# Altium PCB LimeNet-Micro_SODIMM_adapter_1v2.PcbDoc
Units mm, origin at the board's own origin, x right, y up, seen from the top; angles counter-clockwise.
Board outline 67.6 x 30 mm, 2 copper layers (Top, Bottom), stack 1.586 mm thick; 27 components, 55 nets, 309 pads, 78 vias.
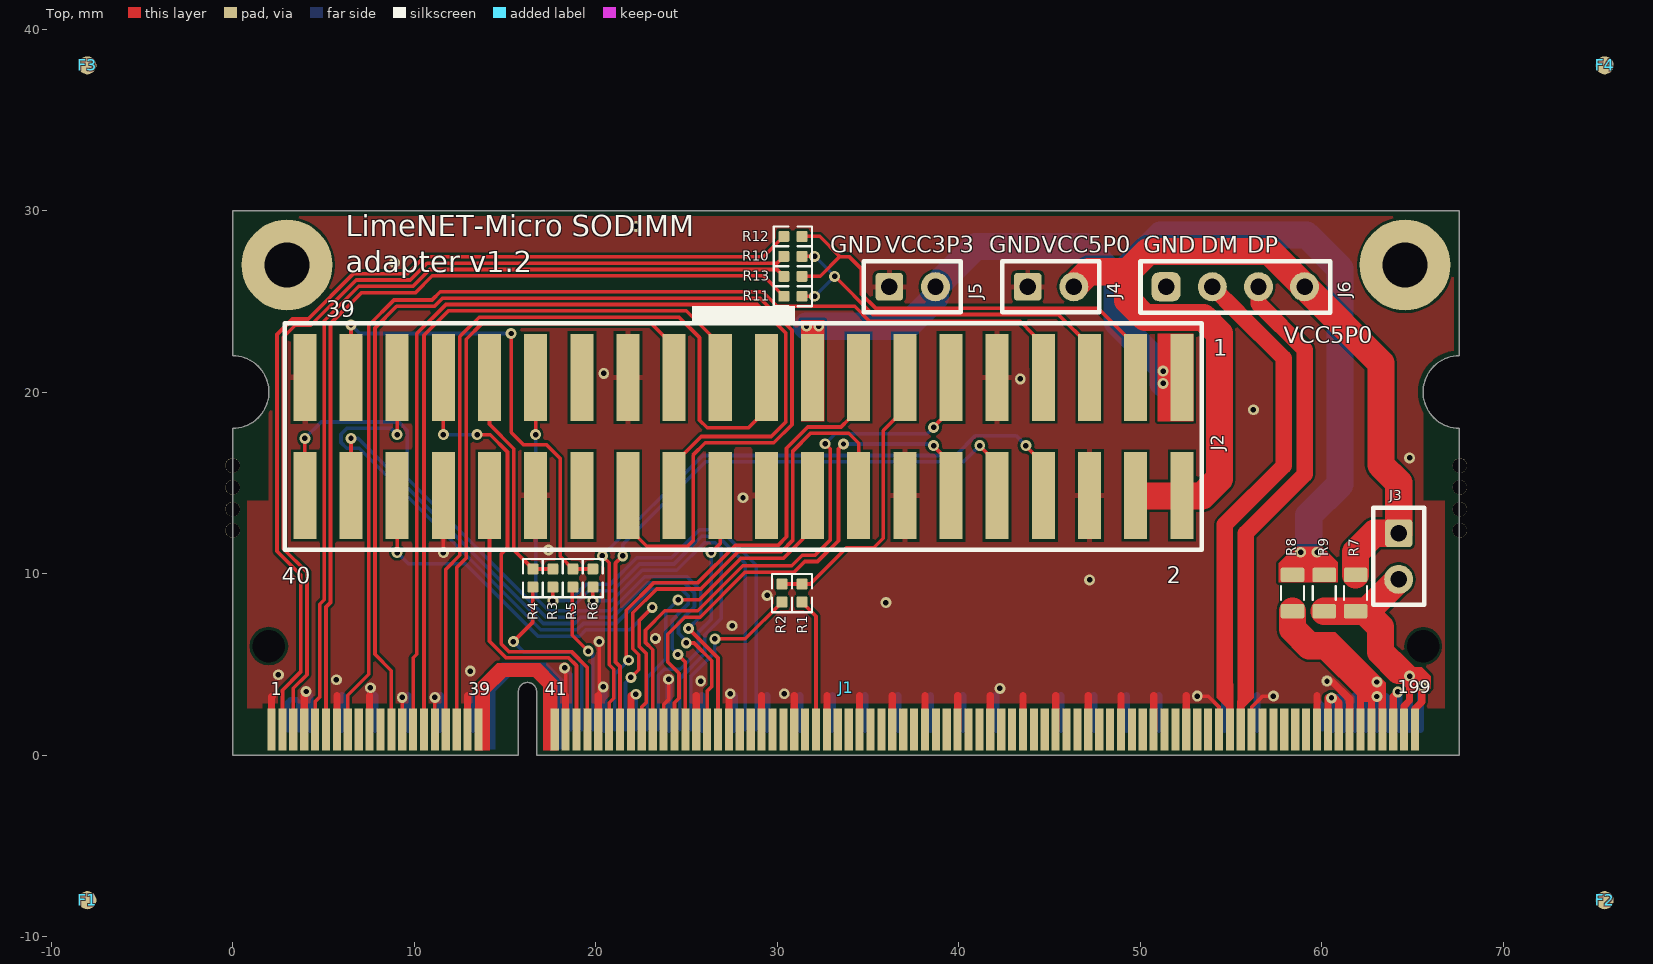
[diagram p0: Top view]
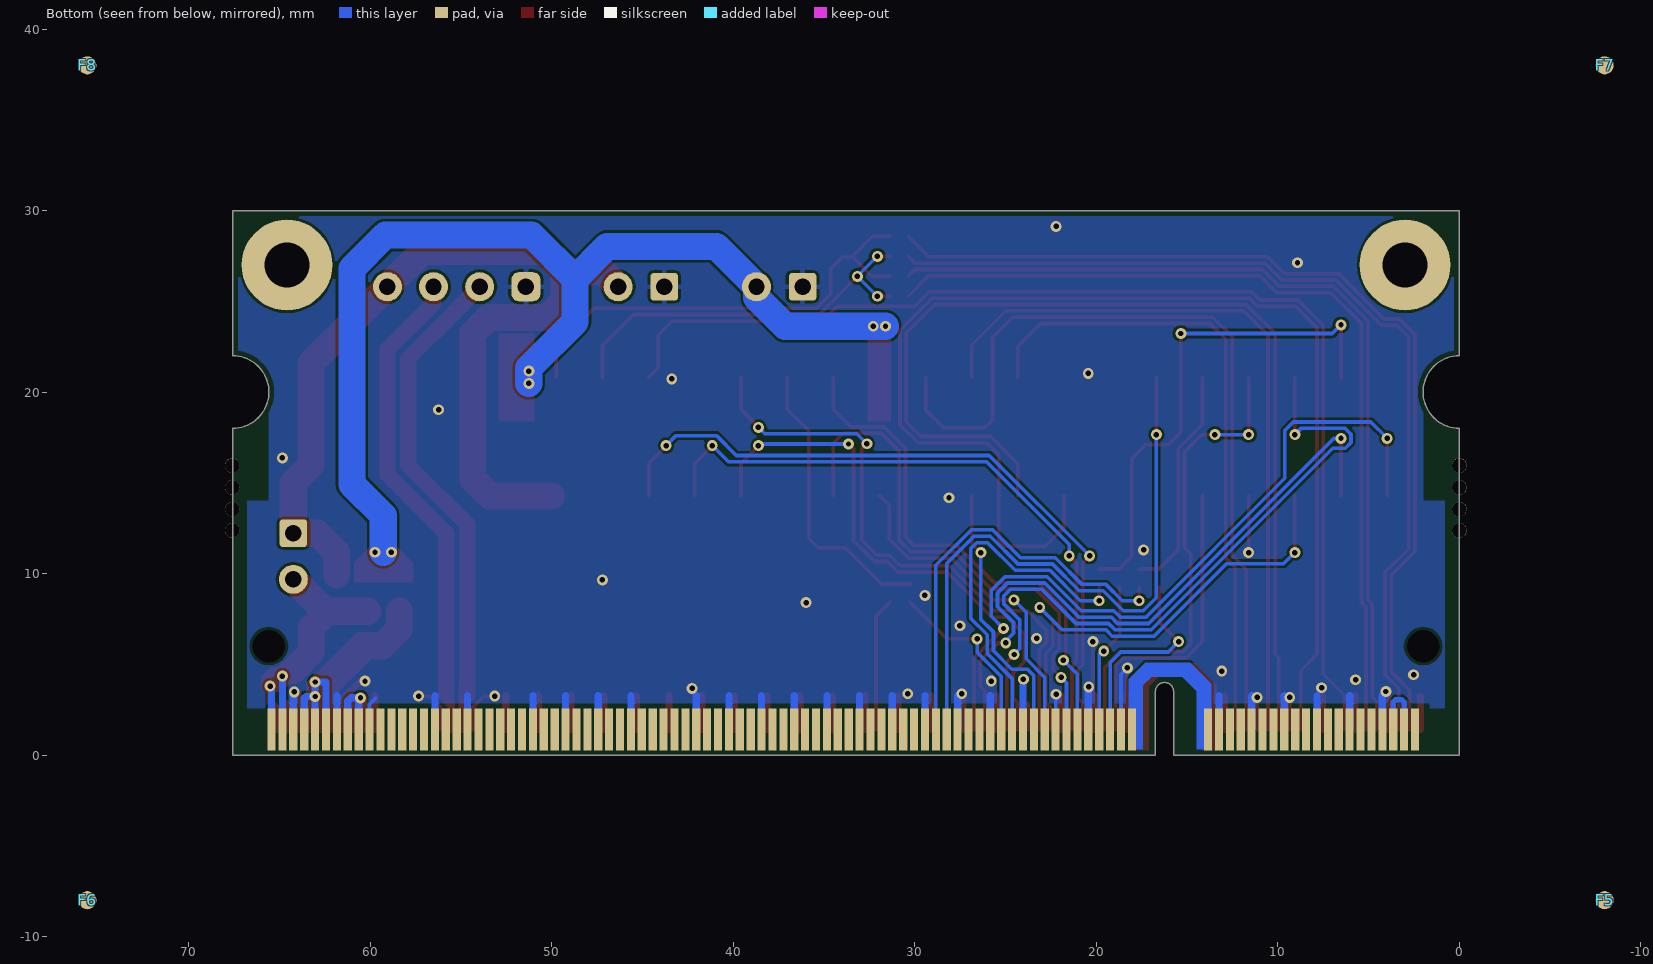
[diagram p1: Bottom view, seen from below]

## Layer stack, top to bottom
TopSolder: solder mask 0.0102, Solder Resist, Dk 3.5
Top: signal copper 0.0178
Dielectric1: core 1.55, FR-4, Dk 4.8
Bottom: signal copper 0.0178
BottomSolder: solder mask 0.0102, Solder Resist, Dk 3.5

## Board outline
0,0 0,18 ccw(c0,20) 0,22 0,30 67.6,30 67.6,22 ccw(c67.6,20) 67.6,18 67.6,0 16.75,0 16.75,3.5 ccw(c16.25,3.5) 15.75,3.5 15.75,0

## Design rules (kind name [scope] priority, off if disabled: settings)
BoardOutlineClearance [All] p1: gap=0.3 ignorepadtopadclearanceinfootprint=FALSE
Clearance [All] p1: gap=0.15 ignorepadtopadclearanceinfootprint=FALSE except(0: Arc-Hole Track-Hole SMDPad-Hole THPad-Hole Via-Hole Fill-Hole Poly-Hole Region-Hole Text-Hole)
ComponentClearance ComponentClearance_RF_jumpers [(ObjectKind = '3D Body') And (Identifier = 'Rpi3Bplus') or (ObjectKind = 'Component')] p1: gap=-15 collisioncheckmode=3 verticalgap=2540 showdistances=FALSE
ComponentClearance [All] p2: gap=0.5 collisioncheckmode=3 verticalgap=0.254 showdistances=FALSE
DiffPairsRouting DiffPairsRouting_RAPI_USB [InDifferentialPair('RAPI_USB_D')] p1: maxlimit=0.3 minlimit=0.15 mostfreqgap=0.25 toplayer_minwidth=0.15 toplayer_maxwidth=2 toplayer_prefwidth=0.9 bottomlayer_minwidth=0.15 bottomlayer_maxwidth=2 bottomlayer_prefwidth=0.9 maxuncoupledlength=2
DiffPairsRouting [All] p2: maxlimit=0.3 minlimit=0.1 mostfreqgap=0.1 toplayer_minwidth=0.1 toplayer_maxwidth=0.5 toplayer_prefwidth=0.2 bottomlayer_minwidth=0.1 bottomlayer_maxwidth=0.5 bottomlayer_prefwidth=0.2 maxuncoupledlength=12.7
FabricationTestPointUsage TestPointUsage [All] p1: valid=0 allowmultiple=FALSE
FabricationTestpoint Testpoint [All] p1: side=3 testpointundercomponent=TRUE minsize=1.016 maxsize=2.54 preferedsize=1.524 minholesize=0.508 maxholesize=1.016 preferedholesize=0.813 testpointgrid=0.025 allowsidetop=TRUE allowsidebottom=TRUE usegrid=TRUE gridtolerance=0
HoleSize [All] p1: absolutevalues=TRUE maxlimit=10 minlimit=0.3 maxpercent=80.000 minpercent=20.000
HoleToHoleClearance [All] p1: gap=0.15 allowstackedmicrovias=TRUE
MinimumSolderMaskSliver [All] p1: minsoldermaskwidth=0.1
PlaneClearance [All] p1: clearance=0
PolygonConnect PolygonConnect_GND_VIA [InNet('GND') and isvia] p1: connectstyle=Direct reliefconductorwidth=0.254 reliefentries=4 polygonreliefangle="90 Angle" airgapwidth=0.254
PolygonConnect PolygonConnect_GND [InNet('GND')] p2: connectstyle=Relief reliefconductorwidth=0.3 reliefentries=4 polygonreliefangle="90 Angle" airgapwidth=0.15
PolygonConnect [All] p3: connectstyle=Relief reliefconductorwidth=0.254 reliefentries=4 polygonreliefangle="90 Angle" airgapwidth=0.254
RoutingVias [All] p1: holewidth=0.2 width=0.4 viastyle="Through Hole" minholewidth=0.2 minwidth=0.31 maxholewidth=4.5 maxwidth=5
SilkToSilkClearance [All] p1: silktosilkclearance=0.1
SilkToSolderMaskClearance SilkscreenOverComponentPads [IsPad] p1: minsilkscreentomaskgap=0.254 clearancetoexposedcopper=TRUE
SolderMaskExpansion [All] p1: expansion=0.05
Width Width_ClumsyConnection [All] p1: maxlimit=7 minlimit=0.15 preferedwidth=0.2 checkconnectedcopper=TRUE
Width [All] p2: maxlimit=5 minlimit=0.15 preferedwidth=0.2
20 further rules are at their usual default settings.

## Classes and differential pairs
net class RAPI_GPIO: RAPI_GPCLK0 RAPI_GPIO27 RAPI_I2C0_SCL RAPI_I2C0_SDA RAPI_I2C1_SCL RAPI_I2C1_SDA RAPI_SPI0_CE0 RAPI_SPI0_CE1 RAPI_SPI0_MISO RAPI_SPI0_MOSI RAPI_SPI0_SCLK RAPI_SPI1_CE0 RAPI_SPI1_CE1 RAPI_SPI1_CE2 RAPI_SPI1_MISO RAPI_SPI1_MOSI RAPI_SPI1_SCLK RAPI_UART0_RX RAPI_UART0_TX
net class RAPI_MISC: RAPI_EMMC_DISABLE
net class RAPI_SDX: RAPI_SDX_CLK RAPI_SDX_CMD RAPI_SDX_D0 RAPI_SDX_D1 RAPI_SDX_D2 RAPI_SDX_D3
net class RAPI_USB: RAPI_USB_D_N RAPI_USB_D_P
differential pair RAPI_USB_D: +RAPI_USB_D_P -RAPI_USB_D_N

## Components (designator, comment, footprint, x,y, rotation, side; value= is the part's Value field where it differs from the comment)
F1 "Fiducial" Fiducial -8,-8 r0 top
F2 "Fiducial" Fiducial 75.6,-8 r0 top
F3 "Fiducial" Fiducial -8,38 r0 top
F4 "Fiducial" Fiducial 75.6,38 r0 top
F5 "Fiducial" Fiducial -8,-8 r180 bottom
F6 "Fiducial" Fiducial 75.6,-8 r180 bottom
F7 "Fiducial" Fiducial -8,38 r180 bottom
F8 "Fiducial" Fiducial 75.6,38 r180 bottom
J1 "DDR SODIMM SOCKET" SODIMM_200PIN_PCB_PADS 0,0 r0 top locked
J2 "Header 20x2_SMD" HEADER20X2_SM_V2_FLIPPED 28.143,17.55 r0 top locked
J3 "5V" HDR_1x2 64.25,10.95 r0 top
J4 "5V" HDR_1x2 45.084,25.8 r90 top locked
J5 "3.3V" HDR_1x2 37.458,25.8 r90 top locked
J6 "USB" HEADER4X1_TH 55.254,25.8 r0 top locked
R1 "0R" RES0402 31.375,8.925 r270 top
R2 "0R" RES0402 30.275,8.925 r270 top
R3 "0R" RES0402 17.65,9.75 r270 top
R4 "0R" RES0402 16.55,9.75 r270 top
R5 "0R" RES0402 18.75,9.75 r270 top
R6 "0R" RES0402 19.85,9.75 r270 top
R7 "0R" RES0805 61.875,8.925 r90 top
R8 "0R" RES0805 58.4,8.925 r90 top
R9 "0R" RES0805 60.15,8.925 r90 top
R10 "0R" RES0402 30.875,27.475 r0 top
R11 "0R" RES0402 30.875,25.275 r0 top
R12 "0R" RES0402 30.875,28.575 r0 top
R13 "0R" RES0402 30.875,26.375 r0 top

## Footprints (in the part's own frame and the unit in brackets; to place one, negate y for a bottom-side part, rotate by r counter-clockwise, add the part's x,y. Pads: shape width x height; smd on the part's side, far side on the other; paste and mask are expansions set on the pad)
Fiducial [mm]
  round 1 smd paste-1 mask+1: 1(0,0)
HDR_1x2 [mm]
  rrect25% 1.524x1.524 hole 0.9: 1(0,1.27)
  round 1.6 hole 0.9: 2(0,-1.27)
  silkscreen extent -1.4,-2.68 1.4,2.68, body extent -1.27,-2.54 1.27,2.54, height 8.54
HEADER4X1_TH [mm]
  rrect50% 1.6x1.6 hole 0.9: 1(-3.814,0)
  round 1.6 hole 0.9: 2(-1.271,0) 3(1.271,0) 4(3.814,0)
  silkscreen extent -5.22,-1.43 5.23,1.4, body extent -5.08,-1.27 5.08,1.27, height 8.54
HEADER20X2_SM_V2_FLIPPED [mm]
  rect 1.27x4.8 smd: 1(24.157,3.25) 2(24.157,-3.25) 3(21.614,3.25) 4(21.614,-3.25) 5(19.071,3.25) 6(19.071,-3.25) 7(16.529,3.25) 8(16.529,-3.25) 9(13.986,3.25) 10(13.986,-3.25) 11(11.443,3.25) 12(11.443,-3.25) 13(8.9,3.25) 14(8.9,-3.25) 15(6.357,3.25) 16(6.357,-3.25) 17(3.814,3.25) 18(3.814,-3.25) 19(1.271,3.25) 20(1.271,-3.25) 21(-1.271,3.25) 22(-1.271,-3.25) 23(-3.814,3.25) 24(-3.814,-3.25) 25(-6.357,3.25) 26(-6.357,-3.25) 27(-8.9,3.25) 28(-8.9,-3.25) 29(-11.443,3.25) 30(-11.443,-3.25) 31(-13.986,3.25) 32(-13.986,-3.25) 33(-16.529,3.25) 34(-16.529,-3.25) 35(-19.071,3.25) 36(-19.071,-3.25) 37(-21.614,3.25) 38(-21.614,-3.25) 39(-24.157,3.25) 40(-24.157,-3.25)
  silkscreen extent -25.26,-6.25 25.26,6.25, body extent -25.42,-3.5 25.38,3.5, height 9.66
RES0402 [mm] "Chip Resistor, Body 1.0x0.5mm, EIA 0402, IPC Medium Density"
  round 0.2 on Mech15: 0(0,0)
  rrect20% 0.6x0.6 smd: 1(-0.5,0) 2(0.5,0)
  Top pour cut-out: -0.2,0.35 0.2,0.35 0.2,-0.35 -0.2,-0.35
  silkscreen extent -1.05,-0.55 1.05,0.55, body extent -0.52,-0.27 0.53,0.28, height 0.4
RES0805 [mm] "Chip Resistor, Body 2.0x1.2mm, 0805, IPC Medium Density"
  round 0.254 on Mech15: 0(0,0)
  rrect25% 0.8x1.3 smd: 1(-1,0) 2(1,0)
  Top pour cut-out: -0.6,0.75 0.6,0.75 0.6,-0.75 -0.6,-0.75
  silkscreen extent -0.38,-0.64 0.38,0.64, body extent -1.1,-0.67 1.1,0.68, height 0.69
SODIMM_200PIN_PCB_PADS [mm] "SODIMM 200PIN card PCB fingers"
  rect 0.45x2.3 smd paste-1 mask+0.3: 1(2.15,1.4) 3(2.75,1.4) 5(3.35,1.4) 7(3.95,1.4) 9(4.55,1.4) 11(5.15,1.4) 13(5.75,1.4) 15(6.35,1.4) 17(6.95,1.4) 19(7.55,1.4) 21(8.15,1.4) 23(8.75,1.4) 25(9.35,1.4) 27(9.95,1.4) 29(10.55,1.4) 31(11.15,1.4) 33(11.75,1.4) 35(12.35,1.4) 37(12.95,1.4) 39(13.55,1.4) 41(17.75,1.4) 43(18.35,1.4) 45(18.95,1.4) 47(19.55,1.4) 49(20.15,1.4) 51(20.75,1.4) 53(21.35,1.4) 55(21.95,1.4) 57(22.55,1.4) 59(23.15,1.4) 61(23.75,1.4) 63(24.35,1.4) 65(24.95,1.4) 67(25.55,1.4) 69(26.15,1.4) 71(26.75,1.4) 73(27.35,1.4) 75(27.95,1.4) 77(28.55,1.4) 79(29.15,1.4) 81(29.75,1.4) 83(30.35,1.4) 85(30.95,1.4) 87(31.55,1.4) 89(32.15,1.4) 91(32.75,1.4) 93(33.35,1.4) 95(33.95,1.4) 97(34.55,1.4) 99(35.15,1.4) 101(35.75,1.4) 103(36.35,1.4) 105(36.95,1.4) 107(37.55,1.4) 109(38.15,1.4) 111(38.75,1.4) 113(39.35,1.4) 115(39.95,1.4) 117(40.55,1.4) 119(41.15,1.4) 121(41.75,1.4) 123(42.35,1.4) 125(42.95,1.4) 127(43.55,1.4) 129(44.15,1.4) 131(44.75,1.4) 133(45.35,1.4) 135(45.95,1.4) 137(46.55,1.4) 139(47.15,1.4) 141(47.75,1.4) 143(48.35,1.4) 145(48.95,1.4) 147(49.55,1.4) 149(50.15,1.4) 151(50.75,1.4) 153(51.35,1.4) 155(51.95,1.4) 157(52.55,1.4) 159(53.15,1.4) 161(53.75,1.4) 163(54.35,1.4) 165(54.95,1.4) 167(55.55,1.4) 169(56.15,1.4) 171(56.75,1.4) 173(57.35,1.4) 175(57.95,1.4) 177(58.55,1.4) 179(59.15,1.4) 181(59.75,1.4) 183(60.35,1.4) 185(60.95,1.4) 187(61.55,1.4) 189(62.15,1.4) 191(62.75,1.4) 193(63.35,1.4) 195(63.95,1.4) 197(64.55,1.4) 199(65.15,1.4)
  rect 0.45x2.3 smd far side paste-1 mask+0.3: 2(2.45,1.4) 4(3.05,1.4) 6(3.65,1.4) 8(4.25,1.4) 10(4.85,1.4) 12(5.45,1.4) 14(6.05,1.4) 16(6.65,1.4) 18(7.25,1.4) 20(7.85,1.4) 22(8.45,1.4) 24(9.05,1.4) 26(9.65,1.4) 28(10.25,1.4) 30(10.85,1.4) 32(11.45,1.4) 34(12.05,1.4) 36(12.65,1.4) 38(13.25,1.4) 40(13.85,1.4) 42(18.05,1.4) 44(18.65,1.4) 46(19.25,1.4) 48(19.85,1.4) 50(20.45,1.4) 52(21.05,1.4) 54(21.65,1.4) 56(22.25,1.4) 58(22.85,1.4) 60(23.45,1.4) 62(24.05,1.4) 64(24.65,1.4) 66(25.25,1.4) 68(25.85,1.4) 70(26.45,1.4) 72(27.05,1.4) 74(27.65,1.4) 76(28.25,1.4) 78(28.85,1.4) 80(29.45,1.4) 82(30.05,1.4) 84(30.65,1.4) 86(31.25,1.4) 88(31.85,1.4) 90(32.45,1.4) 92(33.05,1.4) 94(33.65,1.4) 96(34.25,1.4) 98(34.85,1.4) 100(35.45,1.4) 102(36.05,1.4) 104(36.65,1.4) 106(37.25,1.4) 108(37.85,1.4) 110(38.45,1.4) 112(39.05,1.4) 114(39.65,1.4) 116(40.25,1.4) 118(40.85,1.4) 120(41.45,1.4) 122(42.05,1.4) 124(42.65,1.4) 126(43.25,1.4) 128(43.85,1.4) 130(44.45,1.4) 132(45.05,1.4) 134(45.65,1.4) 136(46.25,1.4) 138(46.85,1.4) 140(47.45,1.4) 142(48.05,1.4) 144(48.65,1.4) 146(49.25,1.4) 148(49.85,1.4) 150(50.45,1.4) 152(51.05,1.4) 154(51.65,1.4) 156(52.25,1.4) 158(52.85,1.4) 160(53.45,1.4) 162(54.05,1.4) 164(54.65,1.4) 166(55.25,1.4) 168(55.85,1.4) 170(56.45,1.4) 172(57.05,1.4) 174(57.65,1.4) 176(58.25,1.4) 178(58.85,1.4) 180(59.45,1.4) 182(60.05,1.4) 184(60.65,1.4) 186(61.25,1.4) 188(61.85,1.4) 190(62.45,1.4) 192(63.05,1.4) 194(63.65,1.4) 196(64.25,1.4) 198(64.85,1.4) 200(65.45,1.4)
  round 1.5 hole 1.8 unplated: MH1(2,6) MH2(65.6,6)
  Top pour cut-out: 67.6,0 66.8,0 66.8,14 65.6,14 65.6,20 65.744,19.235 66.178,18.586 66.827,18.152 67.592,18 67.592,18 67.6,18
  Top pour cut-out: 0,0 0.8,0 0.8,14 2,14 2,20 1.856,19.235 1.422,18.586 0.773,18.152 0.008,18 0.008,18 0,18
  Bottom pour cut-out: 67.6,0 66.8,0 66.8,14 65.6,14 65.6,20 65.744,19.235 66.178,18.586 66.827,18.152 67.592,18 67.592,18 67.6,18
  Bottom pour cut-out: 0,0 0.8,0 0.8,14 2,14 2,20 1.856,19.235 1.422,18.586 0.773,18.152 0.008,18 0.008,18 0,18

## Part data
J1: library part 1717254-1, Manufacturer="TE Connectivity AMP Connectors", Supplier Part Number 1=A111047CT-ND, Category="Connectors, Interconnects", ComponentLink1Description=http://www.te.com/commerce/DocumentDelivery/DDEController?Action=srchrtrv&DocNm=1717254&DocType=Customer+Drawing&DocLang=English, ComponentLink1URL=http://www.te.com/commerce/DocumentDelivery/DDEController?Action=srchrtrv&DocNm=1717254&DocType=Customer+Drawing&DocLang=English, Connector Style=SODIMM, Contact Finish=Gold, Contact Finish Thickness=Flash, Features="Board Guide, Latches", Manufacturer Part Number 1=1717254-1, Memory Type="DDR SDRAM", Mounting Feature="Normal, Standard - Top", Mounting Type="Surface Mount, Right Angle", Packaging="Cut Tape (CT)", Part Description="200 Position SODIMM DDR SDRAM Socket Surface Mount, Right Angle", Part Status=Active, Pricing 1="1=3.29, 10=3.155, 25=2.8924, 50=2.761 (USD)", RoHS="RoHS Compliant", Standards=-, Stock 1=610, Supplier 1=Digi-Key
J2: library part "Header 20x2_TH", Color=Black, Current Rating=3A, Flammability Rating="UL94 V-0", Insulation Resistance=5GR, Manufacturer="Amphenol FCI", Manufacturer Part Number 1=95157-140LF, Max Operating Temperature=125°C, Max Voltage Rating (AC)=1.5kV, Min Operating Temperature=-65°C, Package Quantity=100, Supplier Part Number 1=609-2231-ND, ComponentLink1Description=http://portal.fciconnect.com/Comergent/fci/drawing/95157.pdf?src-supplier=Mouser, ComponentLink1URL=http://portal.fciconnect.com/Comergent/fci/drawing/95157.pdf?src-supplier=Mouser, ComponentLink2Description=http://portal.fciconnect.com/Comergent/fci/drawing/95157.pdf?src-supplier=Avnet, ComponentLink2URL=http://portal.fciconnect.com/Comergent/fci/drawing/95157.pdf?src-supplier=Avnet, ComponentLink3Description=https://cdn.amphenol-icc.com/media/wysiwyg/files/drawing/95157.pdf?src-supplier=Digi-Key, ComponentLink3URL=https://cdn.amphenol-icc.com/media/wysiwyg/files/drawing/95157.pdf?src-supplier=Digi-Key, ComponentLink4Description=http://www.alliedelec.com/m/d/e7f216e54bb1f11c7468e99021090c40.pdf?src-supplier=Allied+Electronics, ComponentLink4URL=http://www.alliedelec.com/m/d/e7f216e54bb1f11c7468e99021090c40.pdf?src-supplier=Allied+Electronics, Connector Type="Male Pin", Contact Gender=Male, Contact Material=Bronze, Contact Mating Length=0.23inch, Contact Plating=Gold, Contact Post Length=4.7mm, Depth=4.83mm, Gender=Male, Housing Color=Black, Housing Material=Thermoplastic, Lead Free="Lead Free", Length=50.8mm, Mount="Surface Mount", Number of Contacts=40, Number of Positions=40, Number of Rows=2, Orientation=Straight, Packaging=Bulk, Pitch=2.54mm, Pricing 1="1=1.5, 10=1.365, 100=1.1703, 500=0.97528, 1000=0.83595, 5000=0.74121, 10000=0.72449 (USD)", Radiation Hardening=No, REACH SVHC="No SVHC", Row Spacing=0.1inch, Stock 1=3049, Supplier 1=Digi-Key, Termination=SMD/SMT, Voltage Rating=1.5kV, Width=4.83mm
J3 J4 J5: library part Jumper, Color=Black, Manufacturer=3M, Manufacturer Part Number 1=961102-6404-AR, Supplier Part Number 1=3M9447-ND, Assembly Info=NF, Category="Connectors, Interconnects", Connector Type="Header, Unshrouded", Contact Finish=Gold, Contact Type="Male Pin", Mounting Type="Through Hole", Part Description="2 Positions Header, Unshrouded Connector 0.100\" (2.54mm) Through Hole Gold", Supplier 1=Digi-Key
J6: library part Header4P, "Header, 4-pin", Current Rating=3A, Insulation Color=Black, Manufacturer="Wurth Electronics Inc.", Manufacturer Part Number 1=61300411121, Material Flammability Rating="UL94 V-0", Operating Temperature="-40°C ~ 125°C", Supplier Part Number 1=732-5317-ND, Voltage Rating=250V, Applications=-, Assembly Info=NF, Category="Connectors, Interconnects", ComponentLink1Description=http://katalog.we-online.de/em/datasheet/6130xx11121.pdf, ComponentLink1URL=http://katalog.we-online.de/em/datasheet/6130xx11121.pdf, Connector Type=Header, Contact Finish - Mating=Gold, Contact Finish - Post=-, Contact Finish Thickness - Mating=-, Contact Finish Thickness - Post=-, Contact Length - Mating="0.236\" (6.00mm)", Contact Length - Post="0.118\" (3.00mm)", Contact Material="Copper Alloy", Contact Shape=Square, Contact Type="Male Pin", Fastening Type=Push-Pull, Features=-, Ingress Protection=-, Insulation Height="0.100\" (2.54mm)", Insulation Material="Polybutylene Terephthalate (PBT)", Mated Stacking Heights=-, Mounting Type="Through Hole", Number of Positions=4, Number of Positions Loaded=All, Number of Rows=1, Overall Contact Length="0.454\" (11.54mm)", Packaging=Bulk, Part Description="4 Positions Header Connector 0.100\" (2.54mm) Through Hole Gold", Part Status=Active, Pitch - Mating="0.100\" (2.54mm)", Pricing 1="1=0.18, 10=0.153, 25=0.1272, 50=0.106, 100=0.096, 1000=0.088 (USD)", RoHS="RoHS Compliant", Row Spacing - Mating=-, Shrouding=Unshrouded, Stock 1=25204, Style="Board to Board or Cable", Supplier 1=Digi-Key, Termination=Solder
R1 R2 R3 R4 R5 R6 R10 R11 R12 R13: library part Res_0402, Manufacturer=Yageo, Manufacturer Part Number 1=RC0402JR-070RL, Package / Case="0402 (1005 Metric)", Supplier Part Number 1=311-0.0JRTR-ND, Category=Resistors, Composition="Thick Film", Part Description="RES SMD 0.0OHM JUMPER 1/16W 0402", Supplier 1=Digi-Key
  R2 R4 R6 R10 R12: Assembly Info=NF
R7 R8 R9: library part Res_0402, Manufacturer="Vishay Dale", Manufacturer Part Number 1=CRCW08050000Z0EA, Operating Temperature="-55°C ~ 155°C", Package / Case="0805 (2012 Metric)", Power (Watts)="0.125W, 1/8W", Resistance (Ohms)=0.0, Supplier Part Number 1=541-0.0ATR-ND, Temperature Coefficient=-, Tolerance=Jumper, Assembly Info=NF, Category=Resistors, Composition="Thick Film", Features="Automotive AEC-Q200", Height="0.020\" (0.50mm)", Number of Terminations=2, Packaging="Tape & Reel (TR)", Part Description="RES SMD 0.0 OHM JUMPER 1/8W 0805", RoHS="RoHS Compliant", Size / Dimension="0.079\" L x 0.049\" W (2.00mm x 1.25mm)", Supplier 1=Digi-Key, Supplier Device Package="0805 (2012 Metric)"

## Free pads (board coordinates)
  round 0.8 hole 0.8 unplated: 0(0,12.375) 0(0,13.55) 0(0,14.75) 0(0,15.95) 0(67.625,12.375) 0(67.625,13.55) 0(67.625,14.75) 0(67.625,15.95)
  round 5 hole 2.5 mask+0.05: 1(3,27) 1(64.6,27)

## Via types
v1: diameter 0.6, hole 0.3, Top to Bottom, tented both sides, 78 vias

## Nets (pads, with @x,y where several pads share a name; then routed paths per layer and width w, separated by ;. In a path a pad name is that pad's centre, name@x,y a point inside that pad or via, vN(x,y) a via of type N, cw(c..) or ccw(c..) an arc to the next point about the centre after c; other vN are vias at no path point)
GND: J1.1 J1.7 J1.8 J1.13 J1.14 J1.19 J1.20 J1.25 J1.26 J1.31 J1.32 J1.37 J1.38 J1.43 J1.44 J1.49 J1.50 J1.55 J1.56 J1.61 J1.62 J1.67 J1.68 J1.73 J1.74 J1.79 J1.80 J1.85 J1.86 J1.91 J1.92 J1.97 J1.98 J1.103 J1.104 J1.109 J1.110 J1.115 J1.116 J1.121 J1.122 J1.127 J1.133 J1.134 J1.139 J1.140 J1.145 J1.146 J1.151 J1.152 J1.157 J1.163 J1.164 J1.169 J1.170 J1.181 J1.182 J1.187 J1.188 J1.195 J1.196 J2.6 J2.9 J2.14 J2.20 J2.25 J2.30 J2.34 J2.39 J4.1 J5.1 J6.1 | length 132.6
  Top w0.2: J1.25 v1(9.35,3.175) ; J1.31 v1(11.15,3.175) ; v1(11.614,11.154) J2.34 ; v1(18.3,4.8) 18.35,4.75 J1.43 ; J1.49 20.2,1.45 v1(20.2,6.253) ; J1.61 23.75,2.77 24.025,3.045 v1(24.025,4.176) ; v1(53.15,3.246) 53.754,3.246 54.35,2.65 J1.163 ; J1.169 56.15,2.65 56.746,3.246 v1(57.35,3.246)
  Top w0.4: J1.1 2.15,3.231 2.202,3.231 ; J1.7 v1@3.95,3.262 ; J1.13 5.75,3.262 ; J1.19 7.55,3.262 ; v1(9.35,3.175) v1@9.35,3.262 ; J1.37 12.95,3.262 ; J1.43 18.35,3.262 ; J1.49 20.15,3.262 ; J1.55 v1@21.95,3.262 ; J1.67 25.55,3.262 ; J1.73 v1@27.35,3.262 ; J1.79 29.15,3.262 ; J1.85 30.95,3.262 ; J1.91 32.75,3.262 ; J1.97 34.55,3.262 ; J1.103 36.35,3.262 ; J1.109 38.15,3.262 ; J1.115 39.95,3.262 ; J1.121 41.75,3.262 ; J1.127 43.55,3.262 ; J1.133 45.35,3.262 ; J1.139 47.15,3.262 ; J1.145 48.95,3.262 ; J1.151 50.75,3.262 ; J1.157 52.55,3.262 ; J1.181 59.75,3.262 ; v1(60.3,4.075) 60.55,4.075 61.55,3.075 J1.187 ; J1.195 63.95,3.225 v1(64.2,3.475)
  Bottom w0.2: v1(18.3,4.8) 18.65,4.45 J1.44 ; v1@22.2,3.075 22.25,3.025 J1.56 ; 59.725,3.125 60.05,2.8 J1.182
  Bottom w0.4: J1.8 4.25,3.262 ; J1.14 6.05,3.262 ; J1.20 7.85,3.262 ; J1.26 9.65,3.262 ; J1.32 11.45,3.262 ; J1.38 13.25,3.262 ; J1.50 v1@20.45,3.75 ; J1.62 v1@24.05,4.176 ; J1.68 25.85,3.262 ; J1.74 v1@27.65,3.262 ; J1.80 29.45,3.262 ; J1.86 31.25,3.262 ; J1.92 33.05,3.262 ; J1.98 34.85,3.262 ; J1.104 36.65,3.262 ; J1.110 38.45,3.262 ; J1.116 40.25,3.262 ; J1.122 42.05,3.262 ; J1.134 45.65,3.262 ; J1.140 47.45,3.262 ; J1.146 49.25,3.262 ; J1.152 51.05,3.262 ; J1.164 54.65,3.262 ; J1.170 56.45,3.262 ; J1.188 61.85,3.262 ; J1.196 v1@64.25,3.475
  other v1: 22.225,3.35 27.425,3.375 30.4,3.375 4.05,3.5 42.275,3.675 7.6,3.705 20.425,3.75 25.8,4.075 5.725,4.15 2.525,4.425 13.1,4.625 23.3,6.425 27.525,7.125 36,8.4 29.45,8.8 47.225,9.65 17.4,11.3 28.125,14.175 64.85,16.375 56.25,19.025 43.4,20.725 20.45,21.025 8.925,27.125 22.225,29.125
NetJ1_4: J1.4 J1.6 | length 3.7
  Bottom w0.3: J1.4 3.05,2.9 3.2,3.05 3.5,3.05 3.65,2.9 J1.6
NetJ1_39: J1.39 J1.41
NetJ1_40: J1.40 J1.42 | length 9.5
  Bottom w0.3: J1.40 13.85,3.675 14.75,4.575 17.125,4.575 18.05,3.65 J1.42
NetJ2_13: J2.13 R1.1 R2.1 | length 16
  Top w0.2: R2.1 R1.1 31.825,9.425 33.825,11.425 35.325,11.425 35.85,11.95 35.85,17.875 36.475,18.5 36.508,18.5 37.043,19.035 J2.13
NetJ2_31: J2.31 R3.1 R4.1 | length 12.6
  Top w0.2: J2.31 14.157,18.218 15.5,16.875 15.5,11.3 R4.1 R3.1
NetJ2_37: J2.37 R5.1 R6.1 | length 28.1
  Top w0.2: J2.37 v1(6.529,23.7) ; v1(15.35,23.225) 15.35,17.775 16.021,17.104 17.285,17.104 18.05,16.339 18.05,10.95 R5.1 R6.1
  Bottom w0.2: v1(6.529,23.7) 7.004,23.225 v1(15.35,23.225)
RAPI3_VCC3P3: J2.1 J2.17 J5.2 R8.2 R9.2 | length 57.2
  Bottom w1.5: v1(31.625,23.625) v1(32.3,23.625) 37.15,23.625 38.728,25.203 J5.2 40.953,28.025 46.95,28.025 48.725,26.25 ; v1(51.275,20.475) v1(51.275,21.15) 51.275,21.325 48.725,23.875 48.725,26.25 ; 59.3,11.175 59.3,13.2 61.025,14.925 61.025,26.8 59.175,28.65 51.125,28.65 48.725,26.25
  other v1: 58.85,11.175 59.75,11.175
RAPI_EMMC_DISABLE: J1.2
RAPI_EMMC_EN: J1.90
RAPI_GPCLK0: J1.15 J2.7 | length 63.7
  Top w0.2: J1.15 6.35,3.3 7.5,4.45 7.5,23.675 8.895,25.07 10.988,25.07 11.443,25.525 29.207,25.525 30.007,24.725 34.275,24.725 35.1,23.9 43.4,23.9 44.136,23.164 44.136,21.335 J2.7
RAPI_GPCLK1: J1.76 J2.29 | length 35.4
  Top w0.2: v1(16.7,17.654) J2.29
  Bottom w0.2: v1(16.7,17.654) 16.7,8.672 17.422,7.95 18.522,7.95 19.622,9.05 20.945,9.05 22.42,10.525 24.326,10.525 25.855,12.054 26.744,12.054 28.25,10.548 J1.76
RAPI_GPCLK2: J1.78 R3.2 | length 23.4
  Top w0.2: v1(17.65,8.5) R3.2
  Bottom w0.2: v1(17.65,8.5) 18.577,8.5 19.477,9.4 20.8,9.4 22.275,10.875 24.181,10.875 25.71,12.404 26.896,12.404 28.85,10.45 J1.78
RAPI_GPIO12: J1.45 J2.32 | length 16.9
  Top w0.2: J2.32 14.157,6.27 15.077,5.35 18.528,5.35 18.95,4.928 J1.45
RAPI_GPIO13: J1.47 J2.33 | length 26.5
  Top w0.2: v1(11.614,17.654) J2.33 ; v1(13.475,17.65) 14.196,17.65 15.15,16.696 15.15,11.425 14.8,11.075 14.8,6.122 15.222,5.7 18.673,5.7 19.55,4.823 J1.47
  Bottom w0.2: v1(11.614,17.654) 11.618,17.65 v1(13.475,17.65)
RAPI_GPIO27: J1.89 R1.2 | length 7.3
  Top w0.2: R1.2 32.15,7.65 J1.89
RAPI_I2C0_SCL: J1.5 R10.1 | length 51.9
  Top w0.2: J1.5 3.35,3.675 4.1,4.425 4.1,10.07 2.8,11.37 2.8,23.025 3.45,23.675 4.31,23.675 6.81,26.175 9.795,26.175 10.72,27.1 30,27.1 R10.1
RAPI_I2C0_SDA: J1.3 R12.1 | length 52.9
  Top w0.2: J1.3 2.75,3.57 3.75,4.57 3.75,9.925 2.45,11.225 2.45,23.17 3.305,24.025 4.165,24.025 6.665,26.525 9.65,26.525 10.575,27.45 29.25,27.45 R12.1
RAPI_I2C1_SCL: J1.11 R11.1 | length 49
  Top w0.2: J1.11 5.15,8.155 5.4,8.405 5.4,23.775 7.1,25.475 10.085,25.475 11.01,26.4 29.25,26.4 R11.1
RAPI_I2C1_SDA: J1.9 R13.1 | length 49.4
  Top w0.2: J1.9 4.55,2.95 4.8,3.2 4.8,8.3 5.05,8.55 5.05,23.92 6.955,25.825 9.94,25.825 10.865,26.75 30,26.75 R13.1
RAPI_I2C_SCL: J2.5 R10.2 R11.2 | length 21.9
  Top w0.2: R11.2 v1(32.075,25.275) ; R10.2 v1(32.075,27.475) ; v1(33.175,26.375) 35.275,24.275 45.5,24.275 47.214,22.561 J2.5
  Bottom w0.2: v1(32.075,25.275) v1(33.175,26.375) v1(32.075,27.475)
RAPI_I2C_SDA: J2.3 R12.2 R13.2 | length 26
  Top w0.2: R13.2 32.375,26.375 33.463,27.463 ; R12.2 32.35,28.575 33.463,27.463 ; J2.3 49.757,22.565 49.222,23.1 49.2,23.1 47.675,24.625 35.42,24.625 34.65,25.395 34.65,26.775 33.963,27.463 33.463,27.463
RAPI_SD1_CLK: J1.52 J2.15 | length 29
  Top w0.2: v1(21.825,5.225) 21.7,5.35 21.7,7.978 23.222,9.5 25.65,9.5 27.7,11.55 30.053,11.55 30.525,12.022 30.525,16.9 31.7,18.075 33.525,18.075 33.95,18.5 33.965,18.5 34.5,19.035 J2.15
  Bottom w0.2: J1.52 21.05,4.45 v1(21.825,5.225)
RAPI_SD1_CMD: J1.54 J2.16 | length 29.4
  Top w0.2: v1(21.95,4.275) 22.375,4.7 22.375,5.525 22.05,5.85 22.05,7.833 23.367,9.15 25.795,9.15 27.845,11.2 30.225,11.2 30.875,11.85 30.875,16.755 31.845,17.725 33.95,17.725 34.5,17.175 J2.16
  Bottom w0.2: J1.54 21.65,3.975 v1(21.95,4.275)
RAPI_SD1_D0: J1.58 J2.18 | length 18.7
  Top w0.2: v1(24.55,8.55) 25.725,8.55 28.025,10.85 30.37,10.85 31.422,11.902 31.422,13.765 J2.18
  Bottom w0.2: J1.58 22.85,4.275 23.872,5.297 23.872,7.872 v1(24.55,8.55)
RAPI_SD1_D1: J1.60 J2.22 | length 14.8
  Top w0.2: v1(26.371,11.154) 26.871,11.654 J2.22
  Bottom w0.2: J1.60 23.45,4.378 23.797,4.726 24.661,4.726 25.675,5.74 25.675,6.773 26.371,7.469 v1(26.371,11.154)
RAPI_SD1_D2: J1.64 R6.2 | length 20.2
  Top w0.2: v1(19.85,8.5) R6.2
  Bottom w0.2: v1(19.85,8.5) 20.89,8.5 22.565,10.175 24.471,10.175 26,11.704 26.599,11.704 26.925,11.378 26.925,7.528 26.025,6.628 26.025,5.595 24.65,4.22 J1.64
RAPI_SD1_D3: J1.66 R2.2 | length 10.1
  Top w0.2: v1(26.575,6.4) 28.25,6.4 R2.2
  Bottom w0.2: J1.66 25.25,4.325 26.575,5.65 v1(26.575,6.4)
RAPI_SDX_CLK: J1.10
RAPI_SDX_CMD: J1.12
RAPI_SDX_D0: J1.16
RAPI_SDX_D1: J1.18
RAPI_SDX_D2: J1.22
RAPI_SDX_D3: J1.24
RAPI_SPI0_CE0: J1.27 J2.24 | length 57.3
  Top w0.2: J1.27 9.95,5.355 10.15,5.555 10.15,23.219 11.756,24.825 28.905,24.825 30.475,23.255 30.475,18.35 29.675,17.55 25.825,17.55 24.329,16.054 J2.24
RAPI_SPI0_CE1: J1.23 J2.26 | length 68.9
  Top w0.2: J1.23 8.75,4.65 7.85,5.55 7.85,23.53 9.04,24.72 11.133,24.72 11.588,25.175 29.05,25.175 30.825,23.4 30.825,18.205 29.82,17.2 26.05,17.2 25.375,16.525 25.375,11.81 25.065,11.5 22.825,11.5 22.325,12 22.321,12 21.786,12.535 J2.26
RAPI_SPI0_MISO: J1.29 J2.21 | length 41.2
  Top w0.2: J1.29 10.55,23.124 11.901,24.475 25,24.475 26.871,22.604 J2.21
RAPI_SPI0_MOSI: J1.33 J2.19 | length 46.7
  Top w0.2: J1.33 11.75,10.225 12.525,11 12.525,23.055 13.595,24.125 24.6,24.125 25.725,23 25.725,18.45 26.15,18.025 28.425,18.025 29.414,19.014 J2.19
RAPI_SPI0_SCLK: J1.35 J2.23 | length 35.8
  Top w0.2: J1.35 12.35,10.33 12.875,10.855 12.875,12.85 12.875,22.91 13.74,23.775 23.075,23.775 24.329,22.521 J2.23
RAPI_SPI1_CE0: J1.63 J2.12 | length 30.7
  Top w0.2: J1.63 24.35,2.875 24.6,3.125 24.6,4.5 23.975,5.125 23.975,6.65 24.92,7.595 25.77,7.595 28.239,10.064 30.939,10.064 31.535,10.66 32.235,10.66 33.386,11.811 33.386,16.861 v1@33.625,17.1 ; v1(38.625,17.05) 38.625,17.025 39.586,16.064 J2.12
  Bottom w0.2: v1(33.661,17.136) 38.308,17.136 38.318,17.127 38.548,17.127 v1(38.625,17.05)
RAPI_SPI1_CE1: J1.59 J2.11 | length 32.8
  Top w0.2: J1.59 23.15,5.797 22.75,6.197 22.75,6.875 23.82,7.945 25.625,7.945 28.105,10.425 30.805,10.425 31.39,11.01 32.09,11.01 32.925,11.845 32.925,16.875 v1(32.65,17.15) ; v1(38.625,18.05) 38.625,18.075 39.586,19.036 J2.11
  Bottom w0.2: v1(32.65,17.15) 33.2,17.7 38.275,17.7 v1(38.625,18.05)
RAPI_SPI1_CE2: J1.57 J2.36 | length 27.1
  Top w0.2: v1(9.071,11.154) J2.36 ; J1.57 22.55,2.647 22.8,2.897 22.8,5.595 22.4,5.995 22.4,7.405 v1(23.125,8.13)
  Bottom w0.2: v1(9.071,11.154) 9.677,10.548 12.827,10.548 16.825,6.55 19.127,6.55 19.477,6.9 21.895,6.9 v1(23.125,8.13)
RAPI_SPI1_MISO: J1.65 J2.35 | length 39.5
  Top w0.2: v1(9.071,17.654) J2.35 ; v1(24.537,5.537) 24.95,5.125 J1.65
  Bottom w0.2: v1(9.071,17.654) 8.729,17.996 6.301,17.996 5.979,17.674 5.979,17.219 6.301,16.896 6.979,16.896 16.975,6.9 18.982,6.9 19.332,7.25 21.125,7.25 23,9.125 24.753,9.125 25.1,8.778 25.1,8.322 24.222,7.445 24.222,5.855 24.537,5.54 v1(24.537,5.537)
RAPI_SPI1_MOSI: J1.69 J2.38 | length 36.4
  Top w0.2: J2.38 v1(6.529,17.446) ; v1(25,6.175) 25.425,6.175 26.4,5.2 26.4,3.775 26.15,3.525 J1.69
  Bottom w0.2: v1(6.529,17.446) 6.525,17.443 6.927,17.443 17.12,7.25 18.837,7.25 19.187,7.6 20.98,7.6 22.855,9.475 24.898,9.475 25.45,8.923 25.45,8.177 24.572,7.3 24.572,6.711 25,6.283 v1(25,6.175)
RAPI_SPI1_SCLK: J1.71 J2.40 | length 41.2
  Top w0.2: J2.40 v1(3.986,17.446) ; v1(25.122,6.972) 26.75,5.345 J1.71
  Bottom w0.2: v1(3.986,17.446) 4.886,18.346 9.156,18.346 9.621,17.881 9.621,15.244 17.265,7.6 18.692,7.6 19.042,7.95 20.835,7.95 22.71,9.825 25.043,9.825 25.8,9.068 25.8,7.65 v1(25.122,6.972)
RAPI_UART0_RX: J1.53 J2.10 | length 35.5
  Top w0.2: J1.53 21.35,4.875 21.1,5.125 21.1,10.575 v1(21.5,10.975) ; v1(41.168,17.05) 41.168,17.025 42.129,16.064 J2.10
  Bottom w0.2: v1(21.5,10.975) 21.5,11.605 26.045,16.15 40.268,16.15 v1(41.168,17.05)
RAPI_UART0_TX: J1.51 J2.8 | length 39.4
  Top w0.2: v1(20.375,10.975) 20.75,10.6 20.75,4.98 21,4.73 21,3.125 20.75,2.875 J1.51 ; v1(43.711,17.05) 43.711,17.025 44.671,16.064 J2.8
  Bottom w0.2: v1(20.375,10.975) 25.9,16.5 39.84,16.5 40.94,17.6 43.161,17.6 v1(43.711,17.05)
RAPI_UART1_RX: J1.48 R5.2 | length 8.4
  Top w0.2: R5.2 18.725,9.225 18.725,6.6 v1(19.6,5.725)
  Bottom w0.2: v1(19.6,5.725) 19.72,5.725 19.85,5.595 J1.48
RAPI_UART1_TX: J1.46 R4.2 | length 11.4
  Top w0.2: v1(15.475,6.25) 16.55,7.325 R4.2
  Bottom w0.2: v1(15.475,6.25) 16.05,5.675 18.662,5.675 19.25,5.087 J1.46
RAPI_USB_D_N: J1.167 J6.3 | length 26
  Top w0.4: J1.167 55.55,2.95
  Top w0.9: 55.825,3.7 55.825,12.225 59.068,15.468 59.068,22.332 56.525,24.875 J6.3
RAPI_USB_D_P: J1.165 J6.2 | length 26.6
  Top w0.4: J1.165 54.95,2.95
  Top w0.9: J6.2 55.375,24.407 55.375,24.399 57.918,21.856 57.918,15.944 54.675,12.701 54.675,3.7
RAPI_VBAT: J1.197 J1.198 J1.199 J1.200 J3.2 R7.1 R9.1 | length 19.9
  Top w0.4: J1.197 64.55,2.7 64.85,3 v1(64.85,4.35) ; J1.199 65.15,2.55 65.525,2.925 v1(65.525,3.8)
  Top w1.5: R9.1 62.495,7.925 J3.2 ; R7.1@62.375,7.925 63.25,7.05 63.25,5.675 64.25,4.675
  Bottom w0.4: J1.198 v1(64.85,4.35) ; J1.200 65.45,3.725 v1(65.525,3.8)
RAPI_VCC1P8: J1.183 J1.184 J1.185 J1.186 | length 8.1
  Top w0.4: J1.183 60.35,3.15 60.697,3.15 60.95,2.897 J1.185
  Bottom w0.4: J1.184 60.65,2.95 60.55,3.05 v1(60.55,3.15) 61.075,3.15 61.25,2.975 J1.186
RAPI_VCC3P3: J1.189 J1.190 J1.191 J1.192 J1.193 J1.194 R8.1 | length 19.3
  Top w0.4: J1.189 62.15,3.275 ; J1.191 62.75,3.325 ; J1.193 63.35,3.275
  Top w1.5: R8.1 58.4,6.95 59.325,6.025 60.375,6.025 62.075,4.325
  Bottom w0.4: J1.190 62.45,4.025 v1(63.05,4.025) ; J1.192 v1@63.05,3.775 ; v1@63.125,3.225 63.55,3.225 63.65,3.125 J1.194
  other v1: 63.05,3.225
RAPI_VCC5P0: J2.2 J2.4 J3.1 J4.2 J6.4 R7.2 | length 54.2
  Top w1.5: J4.2 47.179,26.625 49.325,26.625 ; J2.4@50.025,14.275 53.425,14.275 54.375,15.225 54.375,23.225 53.5,24.1 50.275,24.1 49.325,25.05 49.325,26.625 ; R7.2 61.875,11.175 62.92,12.22 J3.1 64.25,15 63.275,15.975 63.275,21.593 J6.4 57.118,27.75 50.45,27.75 49.325,26.625
pads on no net: F1.1 F2.1 F3.1 F4.1 F5.1 F6.1 F7.1 F8.1 J1.17 J1.21 J1.28 J1.30 J1.34 J1.36 J1.70 J1.72 J1.75 J1.77 J1.81 J1.82 J1.83 J1.84 J1.87 J1.88 J1.93 J1.94 J1.95 J1.96 J1.99 J1.100 J1.101 J1.102 J1.105 J1.106 J1.107 J1.108 J1.111 J1.112 J1.113 J1.114 J1.117 J1.118 J1.119 J1.120 J1.123 J1.124 J1.125 J1.126 J1.128 J1.129 J1.130 J1.131 J1.132 J1.135 J1.136 J1.137 J1.138 J1.141 J1.142 J1.143 J1.144 J1.147 J1.148 J1.149 J1.150 J1.153 J1.154 J1.155 J1.156 J1.158 J1.159 J1.160 J1.161 J1.162 J1.166 J1.168 J1.171 J1.172 J1.173 J1.174 J1.175 J1.176 J1.177 J1.178 J1.179 J1.180 J1.MH1 J1.MH2 J2.27 J2.28 R1.0 R2.0 R3.0 R4.0 R5.0 R6.0 R7.0 R8.0 R9.0 R10.0 R11.0 R12.0 R13.0

## Polygon pours and split planes (outlines as drawn)
GND on Bottom "GND_L02_P055" (solid, remove dead copper, pour order 55): 0,0 0,18 ccw(c0,20) 0,22 0,30 67.6,30 67.6,22 ccw(c67.6,20) 67.6,18 67.6,0 16.75,0 16.75,3.5 ccw(c16.25,3.5) 15.75,3.5 15.75,0
GND on Top "GND_L01_P054" (solid, remove dead copper, pour order 54): 0,0 0,18 ccw(c0,20) 0,22 0,30 67.6,30 67.6,22 ccw(c67.6,20) 67.6,18 67.6,0 16.75,0 16.75,3.5 ccw(c16.25,3.5) 15.75,3.5 15.75,0

## Other copper
Top:
  region net RAPI3_VCC3P3: 50.975,18.4 50.975,23.2 52.943,23.2 52.943,18.4
  region net RAPI3_VCC3P3: 31.325,18.4 31.325,23.95 32.6,23.95 32.6,18.4
  pour cut-out: 1.637,0 1.637,2.85 14.113,2.85 14.113,0
  pour cut-out: 17.238,0 17.238,2.85 65.678,2.85 65.678,0
  region net NetJ1_39: 13.375,0.25 13.375,3.85 14.575,5.05 16.95,5.05 17.9,4.1 17.9,0.25 17.125,0.25 17.125,3.775 16.575,4.325 15.05,4.325 14.175,3.45 14.175,0.25
  region net RAPI_USB_D_P: 55.125,3.925 55.125,2.425 54.95,2.25 54.8,2.4 54.8,2.575 54.225,3.15 54.225,3.925
  region net RAPI_USB_D_N: 55.375,3.925 55.375,2.425 55.55,2.25 55.7,2.4 55.7,2.575 56.275,3.15 56.275,3.925
  region: 64.55,1.675
  region net RAPI_VBAT: 64.25,3.925 64.45,3.925 64.9,3.475 65.825,3.475 66.025,3.675 66.025,4.35 65.525,4.85 65.125,4.85 64.65,5.325 64.275,5.325
  region net RAPI_VCC3P3: 59.825,5.425 62.15,3.1 62.15,2.95 62.175,2.925 63.55,2.925 63.55,3.975 60.75,6.775 59.825,6.775
  region net RAPI3_VCC3P3: 60.9,9.525 60.9,10.625 60.05,11.475 58.55,11.475 57.65,10.575 57.65,9.525
  pour cut-out: 67.6,0 65.375,0 65.375,2.575 67.6,2.575
  pour cut-out: 0,0 2.225,0 2.225,2.575 0,2.575
Bottom:
  pour cut-out: 1.637,0 1.637,2.85 14.113,2.85 14.113,0
  pour cut-out: 17.238,0 17.238,2.85 65.678,2.85 65.678,0
  region net NetJ1_40: 13.687,0.325 13.688,3.925 14.837,5.075 17.313,5.075 18.212,4.175 18.213,0.325 17.437,0.325 17.437,3.85 16.962,4.325 15.287,4.325 14.487,3.525 14.487,0.325
  pour cut-out: 67.6,0 65.375,0 65.375,2.575 67.6,2.575
  pour cut-out: 0,0 2.225,0 2.225,2.575 0,2.575

## Silkscreen, mask and mechanical layers (free items; w line width, h text height)
TopOverlay:
  region: 25.318,24.725 25.318,23.75 30.968,23.75 30.968,24.725
  text "GND" at 32.925,27.675 h0.9
  text "VCC3P3" at 35.975,27.675 h0.9
  text "GND" at 41.7,27.675 h0.9
  text "VCC5P0" at 44.575,27.675 h0.9
  text "GND" at 50.2,27.675 h0.9
  text "DM" at 53.375,27.675 h0.9
  text "DP" at 55.9,27.675 h0.9
  text "LimeNET-Micro SODIMM / adapter v1.2" at 6.25,26.2 h2
  text "39" at 5.15,24.125 h0.9
  text "VCC5P0" at 57.925,22.675 h0.9
  text "1" at 54.025,22 h0.9
  text "2" at 51.475,9.475 h0.9
  text "40" at 2.7,9.425 h0.9
TopSolder:
  pour cut-out: 53.2,0.025 53.2,2.875 65.675,2.875 65.675,0.025
  region: 32.875,49.675 32.8,49.6 32.875,49.6
  region: 29.935,49.675 30.01,49.6 29.935,49.6
  region: 29.935,52.475 30.01,52.55 29.935,52.55
  region: 32.875,52.475 32.8,52.55 32.875,52.55
  region: 29.93,65.15 30.005,65.225 29.93,65.225
  region: 32.87,65.15 32.795,65.225 32.87,65.225
  region: 29.93,62.35 30.005,62.275 29.93,62.275
  region: 32.87,62.35 32.795,62.275 32.87,62.275
Mechanical1:
  drawing of 2439 lines, arcs and shapes, not listed
  text "LimeNET-Micro SODIMM adapter v1.2" at 165.443,177.922 h2.6
  text "STACKUP AND LAYER DESCRIPTION" at 86.525,167.675 h3
  text "TH via" at 224.275,164.9 h1.52
  text "GERBER LAYER NAMES:" at 97.875,163.5 h1.52
  text "Top-Bot" at 223.725,161.825 h1.52
  text "GTP" at 98.975,159.95 h1.52
  text "Top solder paste" at 104.075,159.6 h1
  text "GTO" at 98.975,156.875 h1.52
  text "Silkscreen" at 103.975,156.65 h1
  text "ELECTRICAL LAYERS:" at 238.275,155.4 h1.52
  text "GTS" at 98.975,154.2 h1.52
  text "Soldermask (halogen free)" at 103.975,152.9 h1
  text "Top: Signal/PWR/GND" at 238.95,151.925 h1.52
  text "GTL" at 98.975,151.7 h1.52
  text "0.5oz+plating" at 103.975,151.2 h1
  text "Core" at 126.275,148.9 h1
  text "GBL" at 98.975,147.2 h1.52
  text "Bottom: PWR/Signal/GND" at 239.025,147.175 h1.52
  text "0.5oz+plating" at 103.975,146.7 h1
  text "GBS" at 98.975,144.7 h1.52
  text "Soldermask (halogen free)" at 103.975,143.5 h1
  text "ADDITIONAL LAYERS:" at 241.275,142.9 h1.52
  text "GBO" at 98.975,142.1 h1.52
  text "Silkscreen" at 103.975,141.9 h1
  text "GBP" at 98.975,139.125 h1.52
  text "Bottom solder paste" at 103.975,138.925 h1
  text "Mechanical 1: Board cutout" at 243.975,138.7 h1.52
  text "Total PCB thicknes: 1mm +/- 10%" at 122.575,136.4 h1.52
  text "Via type #1" at 181.025,136.2 h1.52
  text "ASM TOP: Assembly top" at 243.975,135.7 h1.52
  text "0.3mm drill / 0.6mm ring" at 222.275,134.958 h1.2
  text "ASM BOT: Assembly bottom" at 243.975,132.7 h1.52
  text "Mechanical 13: Component 3D body" at 243.975,129.7 h1.52
  text "Notes: Board shape and frame" at 244.05,126.775 h1.52
  text "VERY IMPORTANT NOTES" at 86.525,116.475 h3
  text "GENERAL PCB SPECS" at 86.525,109.975 h1.7
  text "ADDITIONAL REQUIREMENTS" at 195.525,109.975 h1.7
  text "Minimum copper to copper spacing" at 87.425,104.975 h1.5
  text "0.2mm (7.87mil)" at 142.925,104.975 h1.5
  text "Minimum track width" at 87.425,99.975 h1.5
  text "0.2mm (7.87mil)" at 142.925,99.975 h1.5
  text "Electrical test : 100 % netlist." at 200.375,99.975 h1.5
  text "PCB thickness" at 87.425,94.975 h1.5
  text "1mm +/-10%" at 142.925,94.975 h1.5
  text "Boards are to be individually bagged." at 200.375,89.975 h1.5
  text "PCB material" at 87.425,84.975 h1.5
  text "FR-4" at 142.95,84.875 h1.5
  text "External layer" at 142.925,79.975 h1.5
  text "1oz" at 169.525,79.975 h1.5
  text "PCB vendor to silkscreen UL and RoHS compliance marks, vendor logo and date code on top where shown (ignore if none of the info will be placed on PCB)" at 200.375,79.975 h1.5
  text "Copper weight" at 87.425,75.175 h1.5
  text "Internal layer" at 142.925,74.975 h1.5
  text "-" at 169.425,74.975 h1.5
  text "BLUE" at 142.925,69.975 h1.5
  text "Assembly note: Assembly house MUST provide notes in paper with shipped board if there were any changes during assembly and the board is not assembled 100% according to BOM and P&P files. Note example:" at 200.375,66.975 h1.5
  text "Both sides" at 142.925,64.975 h1.5
  text "Comment" at 261.125,62.925 h1.5
  text "Part" at 201.725,61.675 h1.5
  text "Initial BOM asm. note" at 210.125,61.675 h1.5
  text "Current PCB status" at 228.125,61.675 h1.5
  text "-" at 142.925,59.975 h1.5
  text "R1" at 202.975,56.675 h1.5
  text "FIT" at 216.225,56.675 h1.5
  text "NF" at 234.475,56.675 h1.5
  text "Not mounted due to bad footprint" at 245.725,56.175 h1.5
  text "Solder mask" at 87.425,54.975 h1.5
  text "Glossy finish (NOT matte)" at 142.925,54.975 h1.5
  text "IC5" at 202.475,53.675 h1.5
  text "FIT" at 216.225,53.675 h1.5
  text "NF" at 234.475,53.175 h1.5
  text "Not mounted due to part shortage" at 245.725,52.675 h1.5
  text "White epoxy ink" at 142.925,49.975 h1.5
  text "Board Cutout" at 26.4,47.05 h1.5
  text "Only top" at 142.925,44.975 h1.5
  text "-" at 142.925,39.975 h1.5
  text "SODIMM pads (top and bottom) - 30 micro inches of gold over 50 micro inches nickel plating" at 200.375,39.975 h1.5
  text "Silkscreen" at 87.425,34.975 h1.5
  text "No silkscreen on pads" at 142.925,34.975 h1.5
  text "Plated" at 142.925,29.975 h1.5
  text "Non-plated" at 169.425,29.975 h1.5
  text "Hole types on the PCB and information" at 87.425,19.975 h1.5
  text "Hole diameters are final manufactured diameters INCLUDING HOLE METALIZATION." at 147.125,19.975 h1.5
  text "V-score" at 143.675,14.975 h1.5
  text "Tab route" at 169.425,14.975 h1.5
  text "Route process" at 87.425,9.975 h1.5
  text "V-score and tab route" at 143.675,9.975 h1.5
  text "Vendor logo, date code,  / RoHS (placed on top)." at -0.7,7.664 h0.55
  text "Panel" at 87.325,4.975 h1.5
  text "Yes" at 143.675,4.975 h1.5
  text "No" at 169.425,4.975 h1.5
  text "HASL lead free" at 143.675,-0.025 h1.5
  text "HASL with lead" at 143.675,-5.025 h1.5
  text "Immersion gold" at 143.675,-10.025 h1.5
  text "OSP" at 143.675,-15.025 h1.5
  text "Refer to additional requirements" at 161.95,-20.2 h1
  text "Surface finish" at 87.225,-20.325 h1.5
  text "Hard gold" at 143.675,-20.325 h1.5
Notes:
  lines w0.1: 0,11.25 -5,11.25 -5,-5 72.6,-5 72.6,11.25 67.6,11.25 ; 0,17.075 -5,17.075 -5,35 72.6,35 72.6,17.075 67.6,17.075 ; -15.2,-15.2 82.8,-15.2 82.8,45.2 -15.2,45.2 -15.2,-15.2
  lines w0.2: 0,0 0,18 ccw(c0,20) 0,22 0,30 67.6,30 67.6,22 ccw(c67.6,20) 67.6,18 67.6,0 16.75,0 16.75,3.5 ccw(c16.25,3.5) 15.75,3.5 15.75,0 0,0
ASM BOT:
  the board outline again, w0.2
  text "Assembly bottom" at 40.675,31.15 h1.25
ASM TOP:
  region: 25.35,24.7 25.35,23.8 31,23.8 31,24.7
  text "Assembly top" at 25.725,31.25 h1.25

## Dimensions
-15.2,45.2 to -15.2,-15.2 on Mechanical1
-15.2,-15.2 to 82.8,-15.2 on Mechanical1

## Text inside footprints (layer, text, board x,y; h text height)
J1: ASM TOP "Keep Out" at 1.594,14.203 h0.5 r90; ASM TOP "Keep Out" at 67,14.2 h0.5 r90; TopOverlay "199" at 64.2,3.4 h0.7; TopOverlay "41" at 17.2,3.3 h0.7; TopOverlay "39" at 13,3.3 h0.7; TopOverlay "1" at 2.1,3.3 h0.7